# Altium PCB LEL UDS.PcbDoc
Units mm, origin at the board's own origin, x right, y up, seen from the top; angles counter-clockwise.
Board outline 270 x 150 mm, 2 copper layers (Top Layer, Bottom Layer), stack 1.671 mm thick; 11 components, 0 nets, 67 pads, 0 vias.
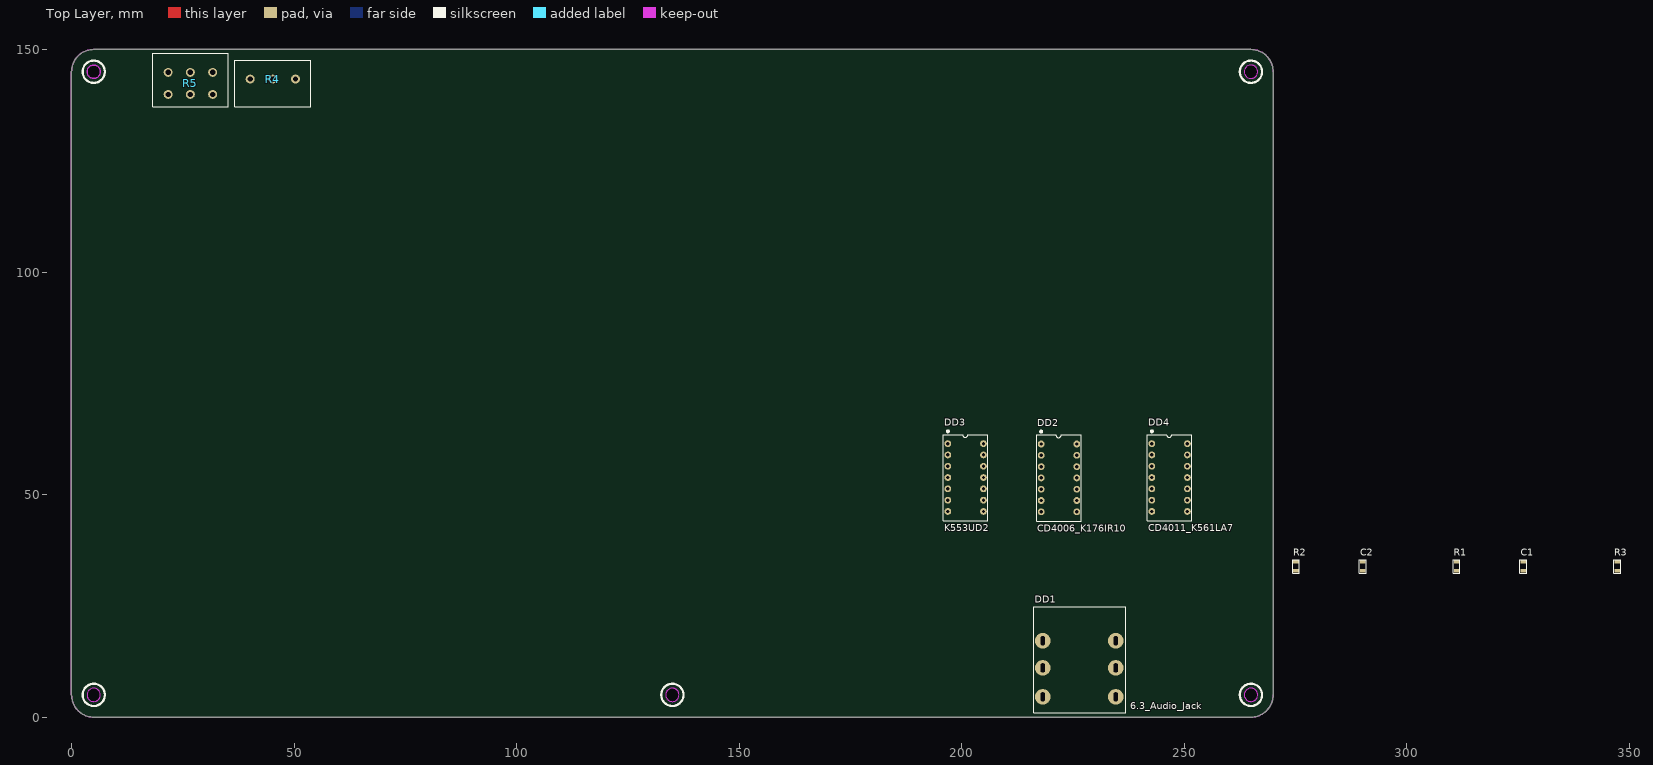
[diagram p0: Top Layer view]
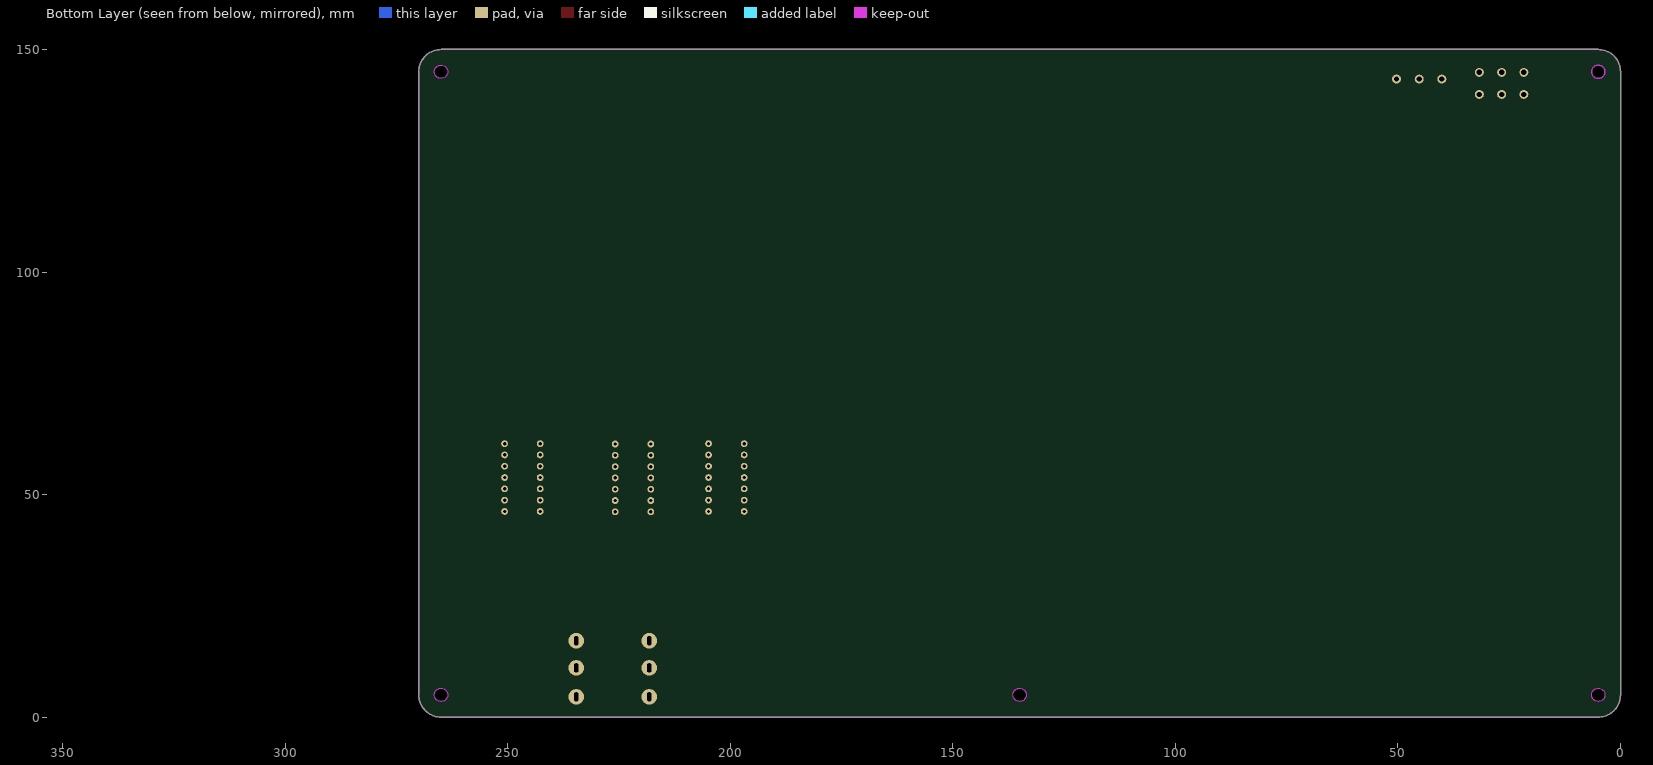
[diagram p1: Bottom Layer view, seen from below]

## Layer stack, top to bottom
Top Solder: solder mask 0.0102, Solder Resist, Dk 3.5
Top Layer: signal copper 0.0356
Dielectric 1: dielectric 1.6, FR-4, Dk 4.8
Bottom Layer: signal copper 0.0356
Bottom Solder: solder mask 0.0102, Solder Resist, Dk 3.5

## Board outline
0,5 0,145 cw(c5,145) 5,150 265,150 cw(c265,145) 270,145 270,5 cw(c265,5) 265,0 5,0 cw(c5,5)
cut-out: 263.5,145 ccw(c265,145) 265,143.5 ccw(c265,145) 266.5,145 ccw(c265,145) 265,146.5 ccw(c265,145)
cut-out: 263.5,5 ccw(c265,5) 265,3.5 ccw(c265,5) 266.5,5 ccw(c265,5) 265,6.5 ccw(c265,5)
cut-out: 133.5,5 ccw(c135,5) 135,3.5 ccw(c135,5) 136.5,5 ccw(c135,5) 135,6.5 ccw(c135,5)
cut-out: 3.5,5 ccw(c5,5) 5,3.5 ccw(c5,5) 6.5,5 ccw(c5,5) 5,6.5 ccw(c5,5)
cut-out: 5,143.5 cw(c5,145) 3.5,145 cw(c5,145) 5,146.5 cw(c5,145) 6.5,145 cw(c5,145)

## Design rules (kind name [scope] priority, off if disabled: settings)
Clearance [All] p1: gap=0.3 ignorepadtopadclearanceinfootprint=FALSE except(0.2: Text-Text Text-Hole)
ComponentClearance [All] p1: gap=0.1 collisioncheckmode=3 verticalgap=0.1 showdistances=FALSE
DiffPairsRouting [All] p1: maxlimit=0.254 minlimit=0.254 mostfreqgap=0.254 substack1={0B3DB408-A969-412D-8C07-BA8AE97219D9} toplayer_{0b3db408-a969-412d-8c07-ba8ae97219d9}_minwidth=0.381 toplayer_{0b3db408-a969-412d-8c07-ba8ae97219d9}_maxwidth=0.381 toplayer_{0b3db408-a969-412d-8c07-ba8ae97219d9}_prefwidth=0.381 bottomlayer_{0b3db408-a969-412d-8c07-ba8ae97219d9}_minwidth=0.381 bottomlayer_{0b3db408-a969-412d-8c07-ba8ae97219d9}_maxwidth=0.381 bottomlayer_{0b3db408-a969-412d-8c07-ba8ae97219d9}_prefwidth=0.381 substack2={94D7C249-735C-4BEB-BDCD-E3D385880C31} toplayer_{94d7c249-735c-4beb-bdcd-e3d385880c31}_minwidth=0.381 toplayer_{94d7c249-735c-4beb-bdcd-e3d385880c31}_maxwidth=0.381 toplayer_{94d7c249-735c-4beb-bdcd-e3d385880c31}_prefwidth=0.381 bottomlayer_{94d7c249-735c-4beb-bdcd-e3d385880c31}_minwidth=0.381 bottomlayer_{94d7c249-735c-4beb-bdcd-e3d385880c31}_maxwidth=0.381 bottomlayer_{94d7c249-735c-4beb-bdcd-e3d385880c31}_prefwidth=0.381 substack3={378827E6-B38F-4565-9D2F-710D8D441C30} toplayer_{378827e6-b38f-4565-9d2f-710d8d441c30}_minwidth=0.381 toplayer_{378827e6-b38f-4565-9d2f-710d8d441c30}_maxwidth=0.381 toplayer_{378827e6-b38f-4565-9d2f-710d8d441c30}_prefwidth=0.381 bottomlayer_{378827e6-b38f-4565-9d2f-710d8d441c30}_minwidth=0.381 bottomlayer_{378827e6-b38f-4565-9d2f-710d8d441c30}_maxwidth=0.381 bottomlayer_{378827e6-b38f-4565-9d2f-710d8d441c30}_prefwidth=0.381 substack4={A23D90DD-733B-49C5-8102-56B3D284E3A0} toplayer_{a23d90dd-733b-49c5-8102-56b3d284e3a0}_minwidth=0.381 toplayer_{a23d90dd-733b-49c5-8102-56b3d284e3a0}_maxwidth=0.381 toplayer_{a23d90dd-733b-49c5-8102-56b3d284e3a0}_prefwidth=0.381 bottomlayer_{a23d90dd-733b-49c5-8102-56b3d284e3a0}_minwidth=0.381 bottomlayer_{a23d90dd-733b-49c5-8102-56b3d284e3a0}_maxwidth=0.381 bottomlayer_{a23d90dd-733b-49c5-8102-56b3d284e3a0}_prefwidth=0.381 toplayer_minwidth=0.381 toplayer_maxwidth=0.381 toplayer_prefwidth=0.381 bottomlayer_minwidth=0.381 bottomlayer_maxwidth=0.381 bottomlayer_prefwidth=0.381 substack5={1E65D4A7-266F-4925-B814-5E9C4A66F8EE} toplayer_{1e65d4a7-266f-4925-b814-5e9c4a66f8ee}_minwidth=0.381 toplayer_{1e65d4a7-266f-4925-b814-5e9c4a66f8ee}_maxwidth=0.381 toplayer_{1e65d4a7-266f-4925-b814-5e9c4a66f8ee}_prefwidth=0.381 bottomlayer_{1e65d4a7-266f-4925-b814-5e9c4a66f8ee}_minwidth=0.381 bottomlayer_{1e65d4a7-266f-4925-b814-5e9c4a66f8ee}_maxwidth=0.381 bottomlayer_{1e65d4a7-266f-4925-b814-5e9c4a66f8ee}_prefwidth=0.381 substack6={93C5D03E-862D-45F8-9871-970EEA9B3F11} toplayer_{93c5d03e-862d-45f8-9871-970eea9b3f11}_minwidth=0.381 toplayer_{93c5d03e-862d-45f8-9871-970eea9b3f11}_maxwidth=0.381 toplayer_{93c5d03e-862d-45f8-9871-970eea9b3f11}_prefwidth=0.381 bottomlayer_{93c5d03e-862d-45f8-9871-970eea9b3f11}_minwidth=0.381 bottomlayer_{93c5d03e-862d-45f8-9871-970eea9b3f11}_maxwidth=0.381 bottomlayer_{93c5d03e-862d-45f8-9871-970eea9b3f11}_prefwidth=0.381 maxuncoupledlength=12.7
Height [All] p1: minheight=0 maxheight=30 prefheight=30
HoleSize [All] p1: absolutevalues=TRUE maxlimit=6 minlimit=0.01 maxpercent=80.000 minpercent=20.000
HoleToHoleClearance [All] p1: gap=0.1 allowstackedmicrovias=TRUE
MinimumSolderMaskSliver [All] p1: minsoldermaskwidth=0.1
PlaneConnect [All] p1: pad.planeconnectstyle=Relief pad.reliefexpansion=0.5 pad.reliefentries=4 pad.reliefconductorwidth=0.5 pad.reliefairgap=0.15 via.planeconnectstyle=Direct via.reliefexpansion=0.5 via.reliefentries=4 via.reliefconductorwidth=0.5 via.reliefairgap=0.15
PolygonConnect VQFN20 [HasFootprint('VQFN20')] p1: connectstyle=Direct reliefconductorwidth=0.254 reliefentries=4 polygonreliefangle="90 Angle" airgapwidth=0.254
PolygonConnect [All] p2: thpad.connectstyle=Relief thpad.reliefconductorwidth=0.3 thpad.reliefentries=4 thpad.polygonreliefangle="90 Angle" thpad.airgapwidth=0.15 smdpad.connectstyle=Relief smdpad.reliefconductorwidth=0.3 smdpad.reliefentries=4 smdpad.polygonreliefangle="90 Angle" smdpad.airgapwidth=0.15 via.connectstyle=Direct via.reliefconductorwidth=0.3 via.reliefentries=4 via.polygonreliefangle="90 Angle" via.airgapwidth=0.15
RoutingVias [All] p1: holewidth=0.1 width=0.1 viastyle="Through Hole" minholewidth=0.11 minwidth=0.1 maxholewidth=2 maxwidth=1
ShortCircuit [All] p1: allowed=TRUE
SilkToSolderMaskClearance [IsPad] p1: minsilkscreentomaskgap=0.1 clearancetoexposedcopper=TRUE
SolderMaskExpansion SolderMaskExpansion_Via [IsVia] p1: expansion=0.102 istentingtop=TRUE
SolderMaskExpansion [All] p2: expansion=0.01 istentingtop=FALSE
UnRoutedNet [All] p1: checkbadconnections=TRUE
Width [All] p1: maxlimit=5 minlimit=0.2 preferedwidth=0.3 substack1={0B3DB408-A969-412D-8C07-BA8AE97219D9} substack2={94D7C249-735C-4BEB-BDCD-E3D385880C31} substack3={378827E6-B38F-4565-9D2F-710D8D441C30} substack4={A23D90DD-733B-49C5-8102-56B3D284E3A0} substack5={1E65D4A7-266F-4925-B814-5E9C4A66F8EE} substack6={93C5D03E-862D-45F8-9871-970EEA9B3F11}
20 further rules are at their usual default settings.

## Components (designator, comment, footprint, x,y, rotation, side; value= is the part's Value field where it differs from the comment)
C1 "CAP-NON-POLAR" CAP-0805 326.196,33.87 r90 top
C2 "CAP-NON-POLAR" CAP-0805 290.119,33.87 r90 top
DD1 "6.3_Audio_Jack" 6.3_Audio_Jack 226.425,7.55 r180 top
DD2 "CD4006_K176IR10" DIP14 221.875,53.74 r0 top
DD3 "K553UD2" DIP14 200.9,53.825 r0 top
DD4 "СD4011_K561LA7" DIP14 246.725,53.825 r0 top
R1 "RES-CONST" RES-0805 311.195,33.87 r90 top
R2 "RES-CONST" RES-0805 275.118,33.87 r90 top
R3 "RES-CONST" RES-0805 347.272,33.87 r90 top
R4 "RES_VAR_1" RES_VAR_1 45.234,147.605 r180 top
R5 "RES_VAR_2" RES_VAR_2 26.708,143.105 r180 top

## Footprints (in the part's own frame and the unit in brackets; to place one, negate y for a bottom-side part, rotate by r counter-clockwise, add the part's x,y. Pads: shape width x height; smd on the part's side, far side on the other; paste and mask are expansions set on the pad)
6.3_Audio_Jack [mm]
  round 3.5 hole 1 slot 2 at 90 deg: 1(-8.2,3) 1(8.2,3) 2(-8.2,-3.5) 2(8.2,-3.5) 3(-8.2,-9.6) 3(8.2,-9.6)
  silkscreen extent -10.4,-17.3 10.2,6.6, body extent -9.95,-17 9.95,15, height 21.49
CAP-0805 [mm]
  rect 0.8x1.25 smd mask+0.015: 1(-1,0) 2(1,0)
  silkscreen extent -1.52,-0.76 1.52,0.76, body extent -1,-0.62 1,0.63, height 0.8
DIP14 [mil]
  round 60 hole 30: 1(-157.48,300) 2(-157.48,200) 3(-157.48,100) 4(-157.48,0) 5(-157.48,-100) 6(-157.48,-200) 7(-157.48,-300) 8(157.48,-300) 9(157.48,-200) 10(157.48,-100) 11(157.48,0) 12(157.48,100) 13(157.48,200) 14(157.48,300)
  silkscreen extent -197,-382 197,417, body extent -157,-375 157,375, height 158
RES-0805 [mm]
  rect 0.8x1.25 smd mask+0.015: 1(-1,0) 2(1,0)
  silkscreen extent -1.52,-0.76 1.52,0.76, body extent -1,-0.62 1,0.63, height 0.6
RES_VAR_1 [mm]
  round 2 hole 1.2: 1(-5.1,4.25) 2(0,4.25) 3(5.1,4.25)
  silkscreen extent -8.5,0 8.5,10.5, body extent -8.5,-19.3 8.5,9.7, height 22.49
RES_VAR_2 [mm]
  round 2 hole 1.2: 1(-5,-1.75) 2(0,-1.75) 3(5,-1.75) 4(5,3.2) 5(0,3.2) 6(-5,3.2)
  silkscreen extent -8.5,-6 8.5,6, body extent -8.5,-24.35 8.5,5.94, height 22.49

## Nets (pads, with @x,y where several pads share a name; then routed paths per layer and width w, separated by ;. In a path a pad name is that pad's centre, name@x,y a point inside that pad or via, vN(x,y) a via of type N, cw(c..) or ccw(c..) an arc to the next point about the centre after c; other vN are vias at no path point)
pads on no net: C1.1 C1.2 C2.1 C2.2 DD1.1 DD1.2 DD1.3 DD2.1 DD2.2 DD2.3 DD2.4 DD2.5 DD2.6 DD2.7 DD2.8 DD2.9 DD2.10 DD2.11 DD2.12 DD2.13 DD2.14 DD3.1 DD3.2 DD3.3 DD3.4 DD3.5 DD3.6 DD3.7 DD3.8 DD3.9 DD3.10 DD3.11 DD3.12 DD3.13 DD3.14 DD4.1 DD4.2 DD4.3 DD4.4 DD4.5 DD4.6 DD4.7 DD4.8 DD4.9 DD4.10 DD4.11 DD4.12 DD4.13 DD4.14 R1.1 R1.2 R2.1 R2.2 R3.1 R3.2 R4.1 R4.2 R4.3 R5.1 R5.2 R5.3 R5.4 R5.5 R5.6

## Keep-outs
Keep-Out Layer:
  circle w0.254: c135,5 r1.5
  circle w0.254: c265,5 r1.5
  circle w0.254: c265,145 r1.5
  circle w0.254: c5,145 r1.5
  circle w0.254: c5,5 r1.5
  lines w0.254: 0,5 ccw(c5,5) 5,0 265,0 ccw(c265,5) 270,5 270,145 ccw(c265,145) 265,150 5,150 ccw(c5,145) 0,145 0,5

## Silkscreen, mask and mechanical layers (free items; w line width, h text height)
Top Overlay:
  circle w0.5: c5,5 r2.5
  circle w0.5: c5,145 r2.5
  circle w0.5: c265,145 r2.5
  circle w0.5: c265,5 r2.5
  circle w0.5: c135,5 r2.5